# Altium PCB ButtonsBrightnessPCB.PcbDoc
Units mil, origin at the board's own origin, x right, y up, seen from the top; angles counter-clockwise.
Board outline 2428 x 3275 mil, 2 copper layers (Top Layer, Bottom Layer); 51 components, 47 nets, 184 pads, 12 vias.
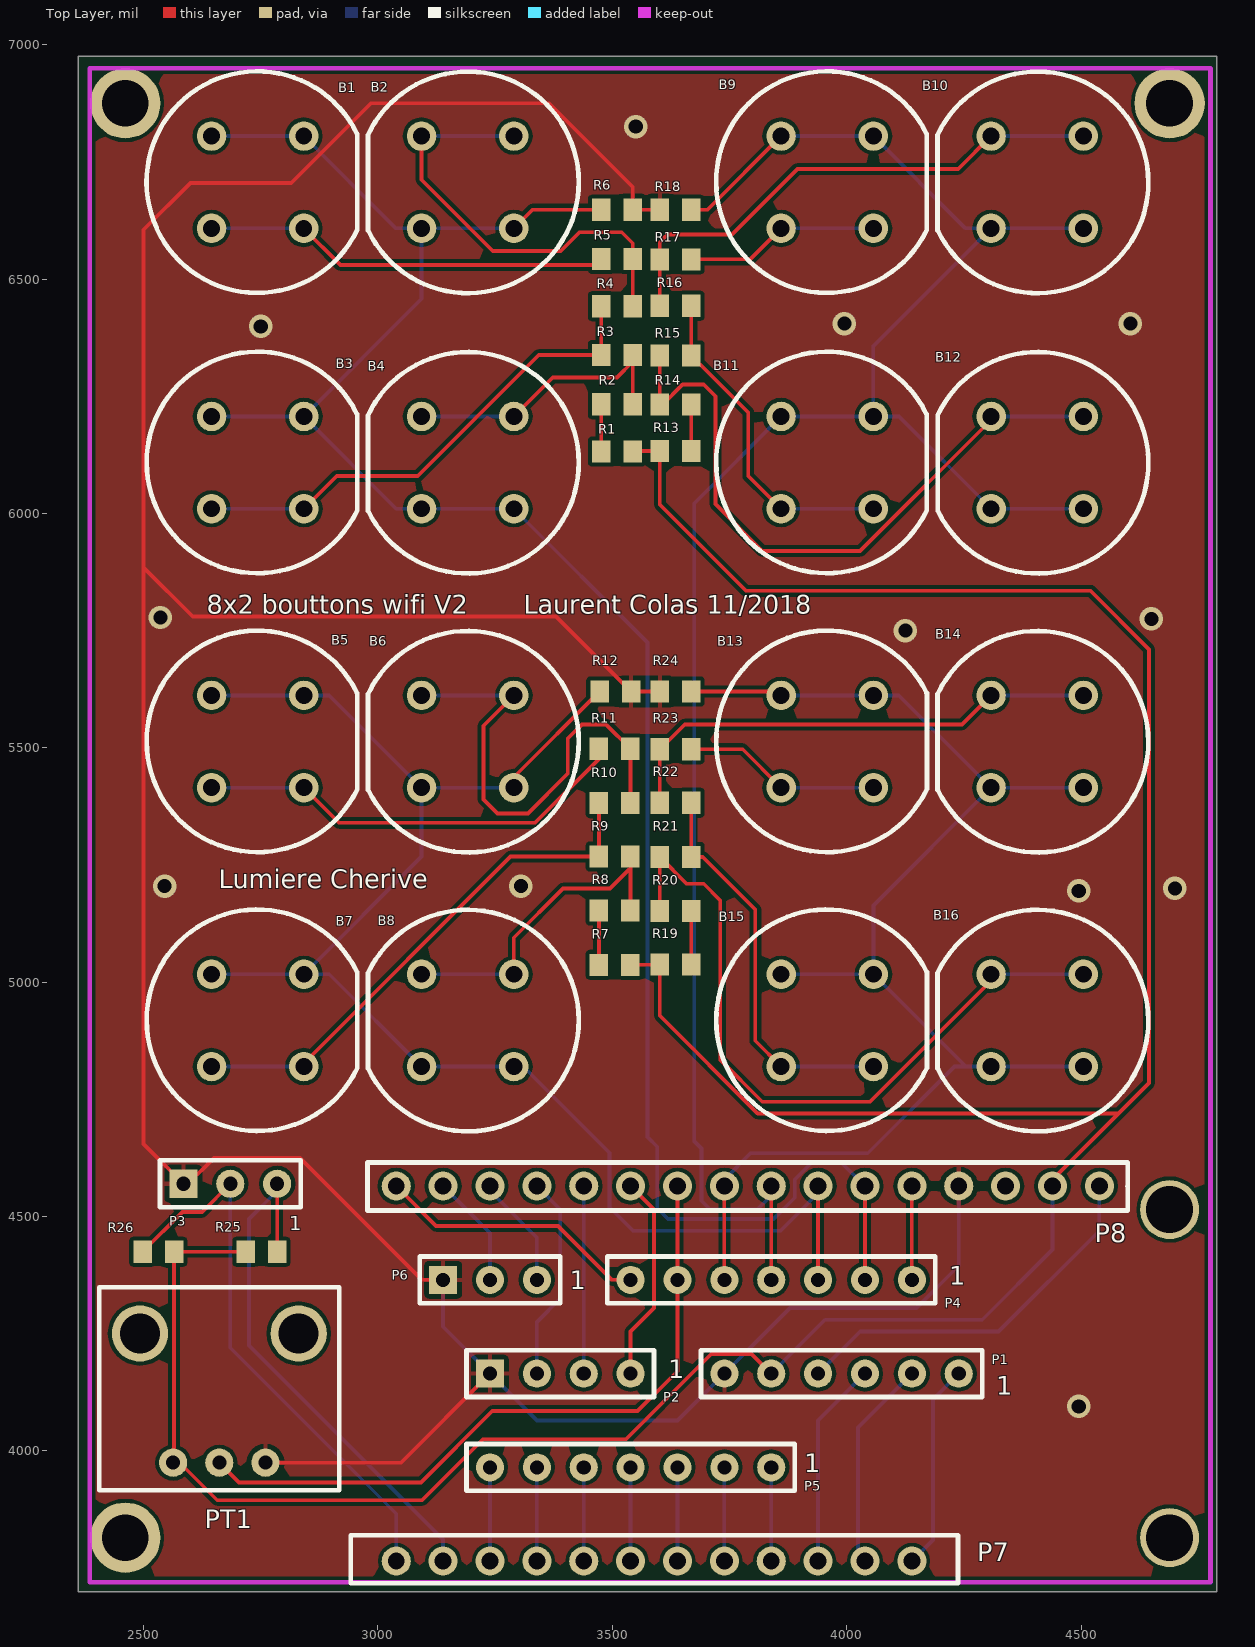
[diagram p0: Top Layer view]
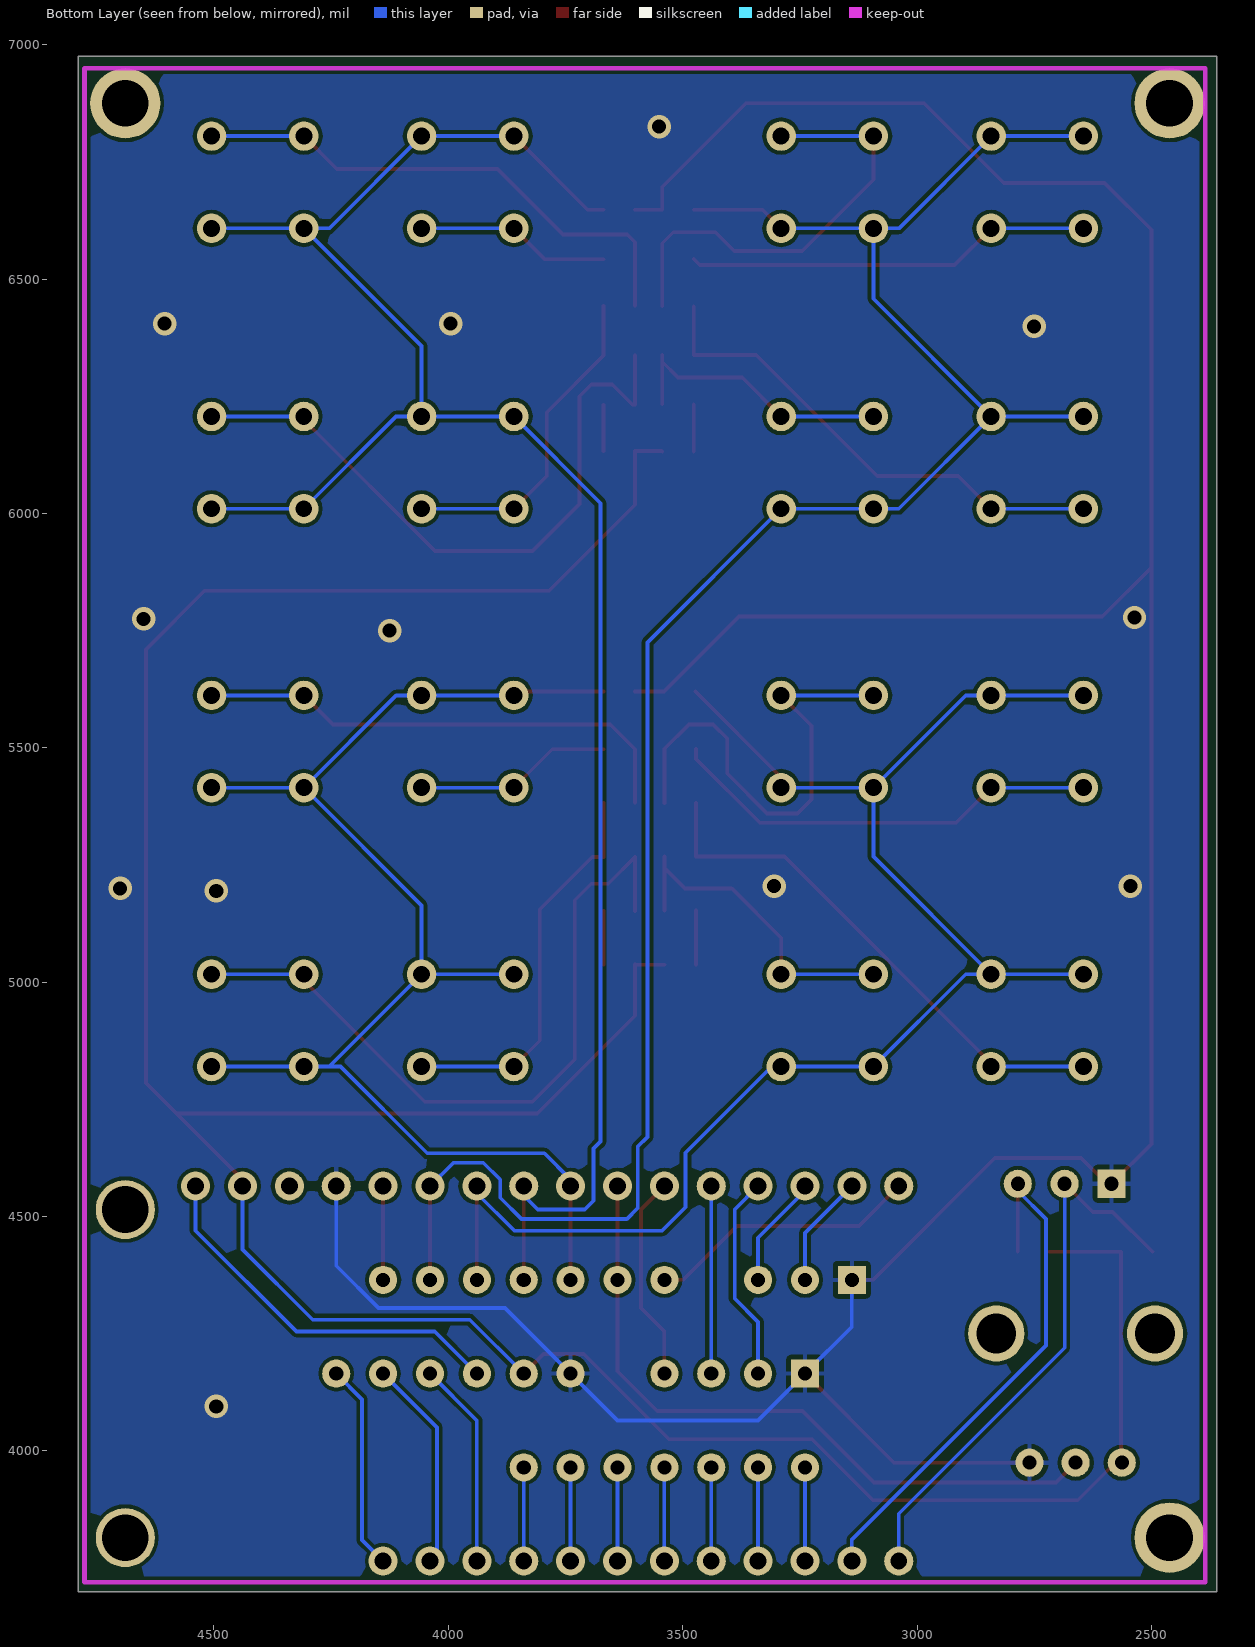
[diagram p1: Bottom Layer view, seen from below]

## Layer stack, top to bottom
Top Solder: solder mask 0.4, Solder Resist, Dk 3.5
Top Layer: signal copper 1.4
Dielectric 1: dielectric 12.6, FR-4, Dk 4.8
Bottom Layer: signal copper 1.4
Bottom Solder: solder mask 0.4, Solder Resist, Dk 3.5

## Board outline
2361,3700 4789,3700 4789,6975 2361,6975

## Design rules (kind name [scope] priority, off if disabled: settings)
Clearance [All] p1: gap=8 ignorepadtopadclearanceinfootprint=FALSE
PolygonConnect PolygonConnect_11 [All vs IsNamedPolygon('botLayer')] p1: thpad.connectstyle=Relief thpad.reliefconductorwidth=10 thpad.reliefentries=4 thpad.polygonreliefangle="90 Angle" thpad.airgapwidth=10 smdpad.connectstyle=Relief smdpad.reliefconductorwidth=10 smdpad.reliefentries=4 smdpad.polygonreliefangle="90 Angle" smdpad.airgapwidth=10 via.connectstyle=Direct via.reliefconductorwidth=10 via.reliefentries=4 via.polygonreliefangle="90 Angle" via.airgapwidth=10
PolygonConnect PolygonConnect_10 [All vs IsNamedPolygon('topLayer')] p2: thpad.connectstyle=Relief thpad.reliefconductorwidth=10 thpad.reliefentries=4 thpad.polygonreliefangle="90 Angle" thpad.airgapwidth=10 smdpad.connectstyle=Relief smdpad.reliefconductorwidth=10 smdpad.reliefentries=4 smdpad.polygonreliefangle="90 Angle" smdpad.airgapwidth=10 via.connectstyle=Direct via.reliefconductorwidth=10 via.reliefentries=4 via.polygonreliefangle="90 Angle" via.airgapwidth=10
PolygonConnect PolygonConnect_9 [All vs IsNamedPolygon('botLayer')] p3: thpad.connectstyle=Relief thpad.reliefconductorwidth=10 thpad.reliefentries=4 thpad.polygonreliefangle="90 Angle" thpad.airgapwidth=10 smdpad.connectstyle=Relief smdpad.reliefconductorwidth=10 smdpad.reliefentries=4 smdpad.polygonreliefangle="90 Angle" smdpad.airgapwidth=10 via.connectstyle=Direct via.reliefconductorwidth=10 via.reliefentries=4 via.polygonreliefangle="90 Angle" via.airgapwidth=10
PolygonConnect PolygonConnect_8 [All vs IsNamedPolygon('topLayer')] p4: thpad.connectstyle=Relief thpad.reliefconductorwidth=10 thpad.reliefentries=4 thpad.polygonreliefangle="90 Angle" thpad.airgapwidth=10 smdpad.connectstyle=Relief smdpad.reliefconductorwidth=10 smdpad.reliefentries=4 smdpad.polygonreliefangle="90 Angle" smdpad.airgapwidth=10 via.connectstyle=Direct via.reliefconductorwidth=10 via.reliefentries=4 via.polygonreliefangle="90 Angle" via.airgapwidth=10
PolygonConnect PolygonConnect_7 [All vs IsNamedPolygon('Bottom Layer-No Net')] p5: thpad.connectstyle=Relief thpad.reliefconductorwidth=10 thpad.reliefentries=4 thpad.polygonreliefangle="90 Angle" thpad.airgapwidth=10 smdpad.connectstyle=Relief smdpad.reliefconductorwidth=10 smdpad.reliefentries=4 smdpad.polygonreliefangle="90 Angle" smdpad.airgapwidth=10 via.connectstyle=Direct via.reliefconductorwidth=10 via.reliefentries=4 via.polygonreliefangle="90 Angle" via.airgapwidth=10
PolygonConnect PolygonConnect_6 [All vs IsNamedPolygon('Bottom Layer-No Net') Or  IsNamedPolygon('Top Layer-No Net')] p6: thpad.connectstyle=Relief thpad.reliefconductorwidth=10 thpad.reliefentries=4 thpad.polygonreliefangle="90 Angle" thpad.airgapwidth=10 smdpad.connectstyle=Relief smdpad.reliefconductorwidth=10 smdpad.reliefentries=4 smdpad.polygonreliefangle="90 Angle" smdpad.airgapwidth=10 via.connectstyle=Direct via.reliefconductorwidth=10 via.reliefentries=4 via.polygonreliefangle="90 Angle" via.airgapwidth=10
PolygonConnect PolygonConnect_5 [All vs IsNamedPolygon('Bottom Layer-No Net')] p7: connectstyle=Relief reliefconductorwidth=15 reliefentries=4 polygonreliefangle="90 Angle" airgapwidth=10
PolygonConnect PolygonConnect_4 [All vs IsNamedPolygon('Top Layer-No Net')] p8: connectstyle=Relief reliefconductorwidth=15 reliefentries=4 polygonreliefangle="90 Angle" airgapwidth=10
PolygonConnect PolygonConnect_3 [All vs IsNamedPolygon('Bottom Layer-No Net')] p9: connectstyle=Direct reliefconductorwidth=10 reliefentries=4 polygonreliefangle="90 Angle" airgapwidth=10
PolygonConnect PolygonConnect_2 [All vs IsNamedPolygon('Top Layer-No Net')] p10: connectstyle=Direct reliefconductorwidth=10 reliefentries=4 polygonreliefangle="90 Angle" airgapwidth=10
PolygonConnect PolygonConnect_1 [All vs IsNamedPolygon('Bottom Layer-No Net')] p11: thpad.connectstyle=Direct thpad.reliefconductorwidth=10 thpad.reliefentries=4 thpad.polygonreliefangle="90 Angle" thpad.airgapwidth=10 smdpad.connectstyle=Direct smdpad.reliefconductorwidth=10 smdpad.reliefentries=4 smdpad.polygonreliefangle="90 Angle" smdpad.airgapwidth=10 via.connectstyle=Relief via.reliefconductorwidth=10 via.reliefentries=4 via.polygonreliefangle="90 Angle" via.airgapwidth=10
PolygonConnect [All] p12: connectstyle=Relief reliefconductorwidth=10 reliefentries=4 polygonreliefangle="90 Angle" airgapwidth=10
RoutingVias [All] p1: holewidth=25 width=40 viastyle="Through Hole" minholewidth=28 minwidth=50 maxholewidth=28 maxwidth=50
SolderMaskExpansion [All] p1: expansion=4
Width [All] p1: maxlimit=20 minlimit=8 preferedwidth=8
30 further rules are at their usual default settings.

## Components (designator, comment, footprint, x,y, rotation, side; value= is the part's Value field where it differs from the comment)
B1 "Button_D6R90" BUTTON_D6R90 2839.88,6608.15 r180 top
B2 "Button_D6R90" BUTTON_D6R90 3095,6805 r0 top
B3 "Button_D6R90" BUTTON_D6R90 2840,6010 r180 top
B4 "Button_D6R90" BUTTON_D6R90 3095,6206.85 r0 top
B5 "Button_D6R90" BUTTON_D6R90 2840,5415 r180 top
B6 "Button_D6R90" BUTTON_D6R90 3095,5611.85 r0 top
B7 "Button_D6R90" BUTTON_D6R90 2840,4820 r180 top
B8 "Button_D6R90" BUTTON_D6R90 3095,5016.85 r0 top
B9 "Button_D6R90" BUTTON_D6R90 4054.88,6608.15 r180 top
B10 "Button_D6R90" BUTTON_D6R90 4310,6805 r0 top
B11 "Button_D6R90" BUTTON_D6R90 4054.88,6010 r180 top
B12 "Button_D6R90" BUTTON_D6R90 4310.12,6206.85 r0 top
B13 "Button_D6R90" BUTTON_D6R90 4055,5415 r180 top
B14 "Button_D6R90" BUTTON_D6R90 4310,5611.85 r0 top
B15 "Button_D6R90" BUTTON_D6R90 4055,4820 r180 top
B16 "Button_D6R90" BUTTON_D6R90 4310,5016.85 r0 top
P1 "Header 6" CONN_6 4239,4165 r180 top
P2 "Header 4" CONN_4 3539,4165 r180 top
P3 "Header 3" CONN_3 2785,4570 r180 top
P4 "Header 7" CONN_7 4139,4365 r180 top
P5 "Header 7" CONN_7 3839,3965 r180 top
P6 "Header 3" CONN_3 3339,4365 r180 top
P7 "Header 12" ESP32_feather_short_pins 4139,3765 r180 top
P8 "Header 16" ESP32_feather_long_pins 4139,3765 r180 top
PT1 "P090S_pot" P090S_POT 2563.15,3975 r0 top
R1 "ERJ-6GEYJ471V" RES_0804_PANASONIC 3510,6135 r0 top
R2 "ERJ-6GEYJ471V" RES_0804_PANASONIC 3510,6230 r180 top
R3 "ERJ-6GEYJ471V" RES_0804_PANASONIC 3510,6335 r180 top
R4 "ERJ-6GEYJ471V" RES_0804_PANASONIC 3510,6445 r0 top
R5 "ERJ-6GEYJ471V" RES_0804_PANASONIC 3510,6540 r180 top
R6 "ERJ-6GEYJ471V" RES_0804_PANASONIC 3510,6650.91 r0 top
R7 "ERJ-6GEYJ471V" RES_0804_PANASONIC 3505,5040 r0 top
R8 "ERJ-6GEYJ471V" RES_0804_PANASONIC 3505,5150 r180 top
R9 "ERJ-6GEYJ471V" RES_0804_PANASONIC 3505,5265 r180 top
R10 "ERJ-6GEYJ471V" RES_0804_PANASONIC 3505,5385 r0 top
R11 "ERJ-6GEYJ471V" RES_0804_PANASONIC 3505,5495 r180 top
R12 "ERJ-6GEYJ471V" RES_0804_PANASONIC 3506.43,5622.95 r0 top
R13 "ERJ-6GEYJ471V" RES_0804_PANASONIC 3635,6130 r180 top
R14 "ERJ-6GEYJ471V" RES_0804_PANASONIC 3635,6235 r0 top
R15 "ERJ-6GEYJ471V" RES_0804_PANASONIC 3635,6340 r0 top
R16 "ERJ-6GEYJ471V" RES_0804_PANASONIC 3635,6440 r180 top
R17 "ERJ-6GEYJ471V" RES_0804_PANASONIC 3635,6545 r0 top
R18 "ERJ-6GEYJ471V" RES_0804_PANASONIC 3635,6645 r180 top
R19 "ERJ-6GEYJ471V" RES_0804_PANASONIC 3635,5035 r180 top
R20 "ERJ-6GEYJ471V" RES_0804_PANASONIC 3635,5155 r0 top
R21 "ERJ-6GEYJ471V" RES_0804_PANASONIC 3635,5270 r0 top
R22 "ERJ-6GEYJ471V" RES_0804_PANASONIC 3635,5380 r180 top
R23 "ERJ-6GEYJ471V" RES_0804_PANASONIC 3635,5500 r0 top
R24 "ERJ-6GEYJ471V" RES_0804_PANASONIC 3635,5617.05 r180 top
R25 "ERJ-6GEYJ471V" RES_0804_PANASONIC 2751.43,4427.95 r0 top
R26 "ERJ-6GEYJ471V" RES_0804_PANASONIC 2531.43,4422.05 r180 top

## Footprints (in the part's own frame and the unit in brackets; to place one, negate y for a bottom-side part, rotate by r counter-clockwise, add the part's x,y. Pads: shape width x height; smd on the part's side, far side on the other; paste and mask are expansions set on the pad)
BUTTON_D6R90 [mm]
  round 1.6 hole 0.914: 1(-0.05,0) 2(4.95,0) 3(-0.05,-5) 4(4.95,-5)
  silkscreen extent -2.95,-8.51 8.47,3.49
CONN_3 [mil]
  round 60 hole 30: 1(0,0) 2(100,0)
  rect 60x60 hole 30: 3(200,0)
  silkscreen extent -50,-50 250,50
CONN_4 [mil]
  round 60 hole 30: 1(0,0) 2(100,0) 3(200,0)
  rect 60x60 hole 30: 4(300,0)
  silkscreen extent -50,-50 350,50
CONN_6 [mil]
  round 60 hole 30: 1(0,0) 2(100,0) 3(200,0) 4(300,0) 5(400,0) 6(500,0)
  silkscreen extent -50,-50 550,50
CONN_7 [mil]
  round 60 hole 30: 1(0,0) 2(100,0) 3(200,0) 4(300,0) 5(400,0) 6(500,0) 7(600,0)
  silkscreen extent -50,-50 650,50
ESP32_feather_long_pins [mil]
  round 62 hole 36: 1(-400,-800) 2(-300,-800) 3(-200,-800) 4(-100,-800) 5(0,-800) 6(100,-800) 7(200,-800) 8(300,-800) 9(400,-800) 10(500,-800) 11(600,-800) 12(700,-800) 13(800,-800) 14(900,-800) 15(1000,-800) 16(1100,-800)
  round 125.98 hole 100: S2(-550,-750)
  silkscreen extent -461,-850 1161,-748
ESP32_feather_short_pins [mil]
  round 62 hole 36: 1(0,0) 2(100,0) 3(200,0) 4(300,0) 5(400,0) 6(500,0) 7(600,0) 8(700,0) 9(800,0) 10(900,0) 11(1000,0) 12(1100,0)
  round 125.98 hole 100: S1(-550,-50)
  silkscreen extent -98,-55 1197,47
P090S_POT [mil]
  round 60 hole 30: 1(0,0) 2(98.43,0) 3(196.85,0)
  round 120 hole 85: 4(-70.87,275.59) 4(267.72,275.59)
  silkscreen extent -157,-59 354,374
RES_0804_PANASONIC [mm]
  rect 1.006x1.2 smd: 1(-0.853,-0.075) 2(0.853,-0.075)

## Part data
P1: "Header, 6-Pin", LatestRevisionDate=17-Jul-2002, LatestRevisionNote="Re-released for DXP Platform.", Publisher="Altium Limited"
P2: "Header, 4-Pin", LatestRevisionDate=17-Jul-2002, LatestRevisionNote="Re-released for DXP Platform.", Publisher="Altium Limited"
P3 P6: "Header, 3-Pin", LatestRevisionDate=17-Jul-2002, LatestRevisionNote="Re-released for DXP Platform.", Publisher="Altium Limited"
P4 P5: "Header, 7-Pin", LatestRevisionDate=17-Jul-2002, LatestRevisionNote="Re-released for DXP Platform.", Publisher="Altium Limited"
P7: "Header, 12-Pin", LatestRevisionDate=17-Jul-2002, LatestRevisionNote="Re-released for DXP Platform.", Publisher="Altium Limited"
P8: "Header, 16-Pin", LatestRevisionDate=17-Jul-2002, LatestRevisionNote="Re-released for DXP Platform.", Publisher="Altium Limited"
R1 R2 R3 R4 R5 R6 R7 R8 R9 R10 R11 R12 R13 R14 R15 R16 R17 R18 R19 R20 R21 R22 R23 R24 R25 R26: Built_By=EMA_UL_Team, C="Copyright (C) 2015 Accelerated Designs. All rights reserved", Manufacturer_Part_Number=ERJ-6GEYJ471V, Vendor=Panasonic

## Free pads (board coordinates)
  round 150 hole 100: 8(2461,3815) 8(2461,6875) 9(4689,6875)

## Via types
v1: diameter 50, hole 30, Top Layer to Bottom Layer, 12 vias

## Nets (pads, with @x,y where several pads share a name; then routed paths per layer and width w, separated by ;. In a path a pad name is that pad's centre, name@x,y a point inside that pad or via, vN(x,y) a via of type N, cw(c..) or ccw(c..) an arc to the next point about the centre after c; other vN are vias at no path point)
3.3V: P1.5 P8.2 PT1.1 R1.2 R7.2 R13.2 R19.2 R25.1 R26.1 | length 6715.9
  Top Layer w8: R25.1 R26.1 2565,3976.85 PT1.1 2577.15,3975 2657.15,3895 3094,3895 3224,4025 3529,4025 3711,4207 3797,4207 P1.5 ; R7.2 3600.52,5037.05 R19.2 3601.43,4928.57 3810,4720 4580,4720 ; R1.2 3544.48,6132.95 R13.2 3601.43,6018.57 3785,5835 4520,5835 4645,5710 4645,4785 4580,4720 ; P8.2 4439,4579 4580,4720
  Bottom Layer w8: P1.5 3954,4280 4289,4280 4439,4430 P8.2
A0: P4.1 P8.5 | length 200
  Top Layer w8: P4.1 P8.5
A1: B1.3 B1.4 B2.3 B2.4 B3.3 B3.4 B4.3 B4.4 P4.2 P8.6 R6.1 | length 4525.5
  Top Layer w8: B2.4 3329.69,6647.95 R6.1 ; P4.2 P8.6
  Bottom Layer w8: B1.4 B1.3 3038.7,6608.15 B2.3 ; B3.4 B3.3 ; B2.4 B2.3 ; P8.6 3989,4615 3925.19,4615 3889,4578.81 3889,4540 3844,4495 3619,4495 3596,4518 3596,4649 3575,4670 3575,5724.88 B4.4 B4.3 3038.82,6010 B3.3 ; B3.3 3093.03,6457.91 B2.3
A2: B5.3 B5.4 B6.3 B6.4 B7.3 B7.4 B8.3 B8.4 P4.3 P8.7 R12.1 | length 3345.7
  Top Layer w8: B6.4 3289.88,5437.03 R12.1 ; P4.3 P8.7
  Bottom Layer w8: B7.4 B7.3 ; B5.4 B5.3 2896.18,5611.85 B6.3 ; B6.4 B6.3 ; P8.7 3939,4550 3859,4470 3544,4470 3494,4520 3494,4636 3310,4820 B8.4 B8.3 2896.18,5016.85 B7.3 ; B7.3 3093.03,5267.91 B6.3
A3: B9.3 B9.4 B10.3 B10.4 B11.3 B11.4 B12.3 B12.4 P4.4 P8.8 R18.1 | length 4359.8
  Top Layer w8: R18.1 3702.95,6647.95 B9.4 ; P4.4 P8.8
  Bottom Layer w8: P8.8 3839,4545 3809,4515 3709,4515 3690,4534 3690,4645 3675,4660 3675,6021.85 B11.4 B11.3 ; B9.4 B9.3 4253.7,6608.15 B10.3 ; B10.4 B10.3 ; B12.4 B12.3 4111.3,6206.85 B11.3 ; B11.3 4056.85,6356.97 B10.3
A4: B13.3 B13.4 B14.3 B14.4 B15.3 B15.4 B16.3 B16.4 P4.5 P8.9 R24.1 | length 2978.3
  Top Layer w8: R24.1 3851.97,5620 B13.4 ; P4.5 P8.9
  Bottom Layer w8: P8.9 3739,4579 3795,4635 4045,4635 4230,4820 4253.82,4820 ; B15.4 B15.3 ; B13.4 B13.3 4111.18,5611.85 B14.3 ; B16.4 B16.3 4253.82,4820 ; B14.4 B14.3 ; B15.3 4253.82,4820 ; B15.3 4056.97,5163.94 B14.3
A5: P4.6 P8.10 PT1.2 | length 1488
  Top Layer w8: PT1.2 2703.57,3933 3092,3933 3244,4085 3554,4085 3639,4170 P4.6 P8.10
BAT: P1.1 P7.1 | length 441.4
  Bottom Layer w8: P7.1 4184,3810 4184,4110 P1.1
EN: P1.2 P7.2 | length 453.8
  Bottom Layer w8: P7.2 4024,3780 4024,4050 P1.2
GND: P1.6 P2.4 P3.3 P6.3 P8.4 PT1.3 R6.2 R12.2 R18.2 R24.2 | length 7434.8
  Top Layer w8: PT1.3@2774,3975 3049,3975 P2.4 ; P6.3 3094,4365 2834,4625 2650,4625 2595,4570 P3.3 2500,4655 2500,5885 ; R24.2 R12.2 3380,5780 2605,5780 2500,5885 ; R18.2 R6.2 3543.57,6696.43 3365,6875 2985,6875 2815,6705 2600,6705 2500,6605 2500,5885
  Bottom Layer w8: P6.3 3139,4265 P2.4 3339,4065 3639,4065 P1.6 3879,4305 4149,4305 4239,4395 P8.4
  other v1: 4495,4095 4495,5195 4700,5200 2545,5205 3305,5205 4125,5750 4650,5775 2536,5778 2750,6399 3995,6405 4605,6405 3550,6825
IO12: P5.2 P7.5 | length 200
  Bottom Layer w8: P7.5 P5.2
IO13: P5.1 P7.4 | length 200
  Bottom Layer w8: P7.4 P5.1
IO14: P5.7 P7.10 | length 200
  Bottom Layer w8: P7.10 P5.7
IO15: P5.5 P7.8 | length 200
  Bottom Layer w8: P7.8 P5.5
IO21: P4.7 P8.16 | length 582.8
  Top Layer w8: P8.16 3124,4480 3384,4480 3499,4365 P4.7
IO27: P5.3 P7.6 | length 200
  Bottom Layer w8: P7.6 P5.3
IO32: P5.6 P7.9 | length 200
  Bottom Layer w8: P7.9 P5.6
IO33: P5.4 P7.7 | length 200
  Bottom Layer w8: P7.7 P5.4
MISO: P2.3 P8.13 | length 441.4
  Bottom Layer w8: P2.3 3339,4275 3389,4325 3389,4515 P8.13
MOSI: P2.2 P8.12 | length 400
  Bottom Layer w8: P2.2 P8.12
NetB1_1: B1.1 B1.2 R5.2 | length 869.2
  Top Layer w8: B1.1 2920,6530 3463.47,6530 R5.2
  Bottom Layer w8: B1.2 B1.1
NetB2_1: B2.1 B2.2 R4.2 R5.1 | length 964.1
  Top Layer w8: B2.1 3093.03,6711.97 3245,6560 3390,6560 3430,6600 3520,6600 3543.57,6576.43 R5.1 R4.2
  Bottom Layer w8: B2.1 B2.2
NetB3_1: B3.1 B3.2 R3.2 R4.1 | length 1071.2
  Top Layer w8: B3.1 2911.97,6080 3085,6080 3342.95,6337.95 R3.2 R4.1
  Bottom Layer w8: B3.2 B3.1
NetB4_1: B4.1 B4.2 R2.1 R3.1 | length 603.9
  Top Layer w8: B4.2 3373.03,6290 3510,6290 R3.1@3543.57,6323.57 ; R2.1 R3.1@3543.57,6323.57 ; R3.1 R3.1@3543.57,6323.57
  Bottom Layer w8: B4.1 B4.2
NetB5_1: B5.1 B5.2 R11.2 | length 935.4
  Top Layer w8: B5.1 2916.97,5340 3335,5340 3471.43,5476.43 R11.2
  Bottom Layer w8: B5.2 B5.1
NetB6_1: B6.1 B6.2 R10.2 R11.1 | length 1031.7
  Top Layer w8: B6.2 3225,5546.97 3225,5390 3255,5360 3320,5360 3405,5445 3405,5520 3435,5550 3486.53,5550 R11.1 R10.2
  Bottom Layer w8: B6.1 B6.2
NetB7_1: B7.1 B7.2 R9.2 R10.1 | length 1130.2
  Top Layer w8: B7.1 2841.97,4827.3 3282.62,5267.95 R9.2 R10.1
  Bottom Layer w8: B7.2 B7.1
NetB8_1: B8.1 B8.2 R8.1 R9.1 | length 700.2
  Top Layer w8: B8.2 3289.88,5094.88 3395,5200 3495,5200 3538.57,5243.57 ; R8.1 3538.57,5243.57 ; R9.1 3538.57,5243.57
  Bottom Layer w8: B8.1 B8.2
NetB9_1: B9.1 B9.2 R17.2 | length 415.7
  Top Layer w8: R17.2 3793.9,6542.05 B9.2
  Bottom Layer w8: B9.2 B9.1
NetB10_1: B10.1 B10.2 R16.2 R17.1 | length 1132.8
  Top Layer w8: R16.2 R17.1 3601.43,6578.43 3618,6595 3755,6595 3895,6735 4238.03,6735 B10.1
  Bottom Layer w8: B10.1 B10.2
NetB11_1: B11.1 B11.2 R15.2 R16.1 | length 709.1
  Top Layer w8: R16.1 R15.2 3790,6215.62 3790,6080 B11.2
  Bottom Layer w8: B11.2 B11.1
NetB12_1: B12.1 B12.2 R14.1 R15.1 | length 1431.1
  Top Layer w8: R15.1 R14.1 3607.05,6232.05 3650,6275 3695,6275 3720,6250 3720,6020 3820,5920 4028.36,5920 4308.15,6199.79 B12.1
  Bottom Layer w8: B12.1 B12.2
NetB13_1: B13.1 B13.2 R23.2 | length 422.4
  Top Layer w8: R23.2 3778.07,5497.05 B13.2
  Bottom Layer w8: B13.2 B13.1
NetB14_1: B14.1 B14.2 R22.2 R23.1 | length 1065.1
  Top Layer w8: R22.2 R23.1 3654.38,5550 4246.18,5550 B14.1
  Bottom Layer w8: B14.1 B14.2
NetB15_1: B15.1 B15.2 R21.2 R22.1 | length 853.4
  Top Layer w8: R22.1 R21.2 3692.95,5267.05 3805,5155 3805,4875.12 B15.2
  Bottom Layer w8: B15.2 B15.1
NetB16_1: B16.1 B16.2 R20.1 R21.1 | length 1554.6
  Top Layer w8: R20.1 R21.1 3658.47,5210 3695,5210 3730,5175 3730,4835 3820,4745 4050,4745 4308.03,5003.03 B16.1
  Bottom Layer w8: B16.1 B16.2
NetR1_1: R1.1 R2.2 | length 100.9
  Top Layer w8: R1.1 R2.2
NetR7_1: R7.1 R8.2 | length 115.9
  Top Layer w8: R7.1 R8.2
NetR13_1: R13.1 R14.2 | length 99.1
  Top Layer w8: R13.1 R14.2
NetR19_1: R19.1 R20.2 | length 114.1
  Top Layer w8: R19.1 R20.2
RST: P1.4 P8.1 | length 821.3
  Bottom Layer w8: P1.4 4029,4255 4324,4255 4539,4470 P8.1
RX: P6.1 P8.14 | length 241.4
  Bottom Layer w8: P8.14 3239,4555 3339,4455 P6.1
SCK: P2.1 P8.11 | length 441.4
  Top Layer w8: P2.1 3539,4255 3589,4305 3589,4515 P8.11
SCL: P3.1 P7.11 R25.2 | length 1146.3
  Top Layer w8: R25.2 P3.1
  Bottom Layer w8: P3.1 2785,4555 2725,4495 2725,4225 3139,3811 P7.11
SDA: P3.2 P7.12 R26.2 | length 1198.8
  Top Layer w8: R26.2 2582.85,4510 2625,4510 P3.2
  Bottom Layer w8: P3.2 2685,4220 3039,3866 P7.12
TX: P6.2 P8.15 | length 241.4
  Bottom Layer w8: P8.15 3239,4465 P6.2
USB: P1.3 P7.3 | length 441.4
  Bottom Layer w8: P7.3 3939,4065 P1.3
pads on no net: P7.S1 P8.3 P8.S2 PT1.4

## Polygon pours and split planes (outlines as drawn)
GND on Bottom Layer "botLayer" (solid, remove dead copper, pour order 2): 2385,6950 4776,6950 4776,3720 2385,3720
GND on Top Layer "topLayer" (solid, remove dead copper, pour order 0): 2385,6950 4776,6950 4776,3720 2385,3720

## Keep-outs
Keep-Out Layer:
  lines w10: 2385,3720 4776,3720 4776,6950 2385,6950 2385,3720

## Silkscreen, mask and mechanical layers (free items; w line width, h text height)
Top Overlay:
  text "8x2 bouttons wifi V2       Laurent Colas 11/2018" at 2635,5786 h40
  text "Lumiere Cherive" at 2660,5200 h40
Mechanical 1:
  lines w10: 2360,3700 4789,3700 4789,6975 2360,6975 2360,3700

## Text inside footprints (layer, text, board x,y; h text height)
P1: Top Overlay "1" at 4319,4120 h40
P2: Top Overlay "1" at 3619,4155 h40
P3: Top Overlay "1" at 2811,4471 h30
P4: Top Overlay "1" at 4219,4355 h40
P5: Top Overlay "1" at 3909,3955 h40
P6: Top Overlay "1" at 3409,4345 h40